# Altium PCB SensorBoard.PcbDoc
Units mm, origin at the board's own origin, x right, y up, seen from the top; angles counter-clockwise.
Board outline 80.54 x 80.54 mm, 2 copper layers (Top Layer, Bottom Layer), stack 1.595 mm thick; 19 components, 23 nets, 135 pads, 145 vias.
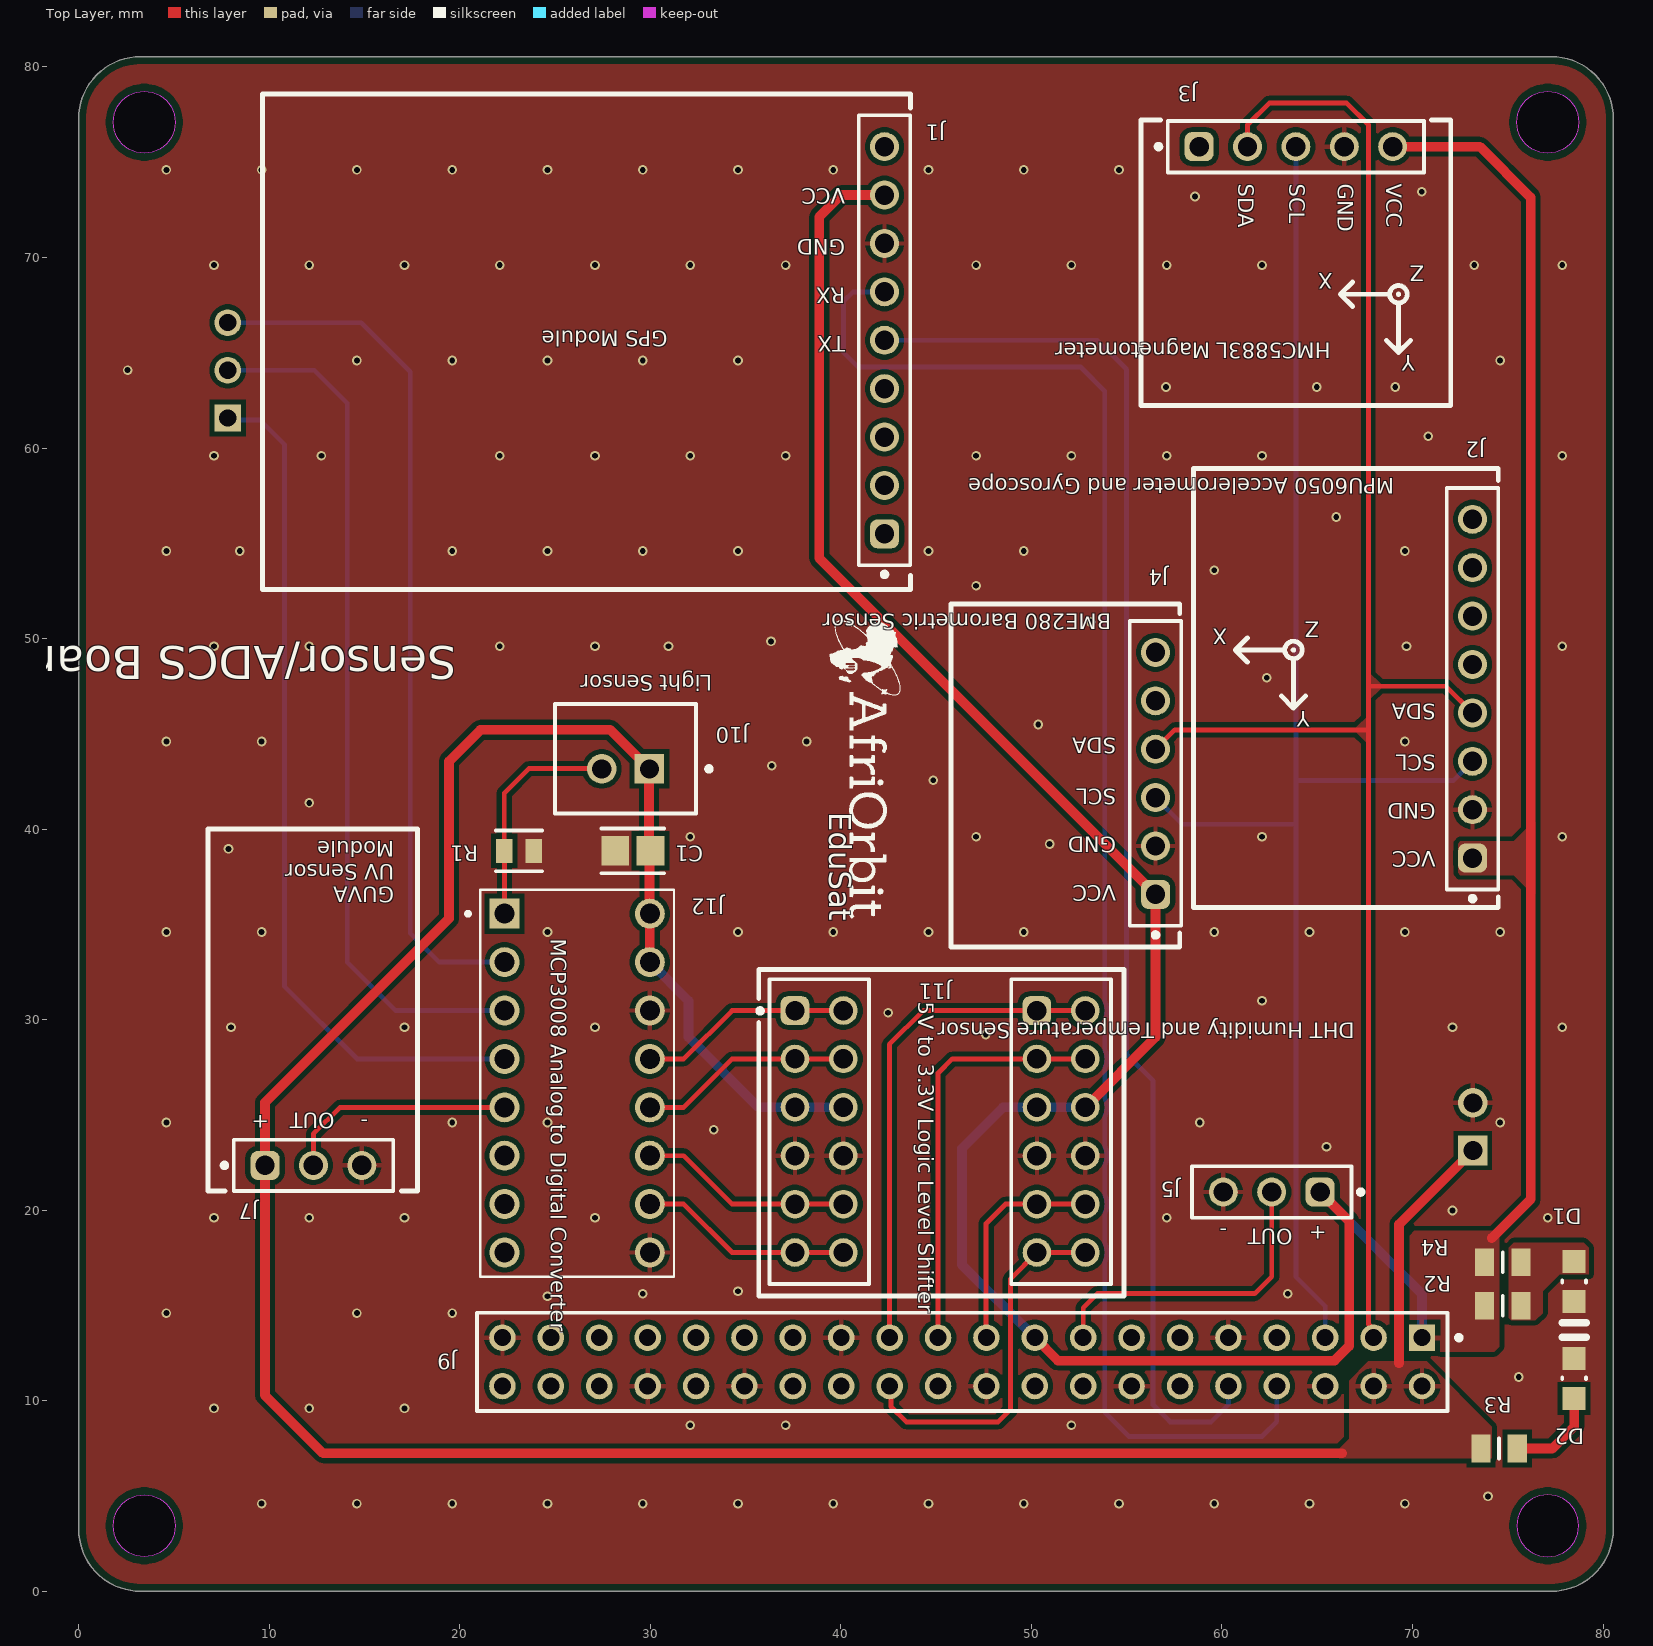
[diagram p0: Top Layer view]
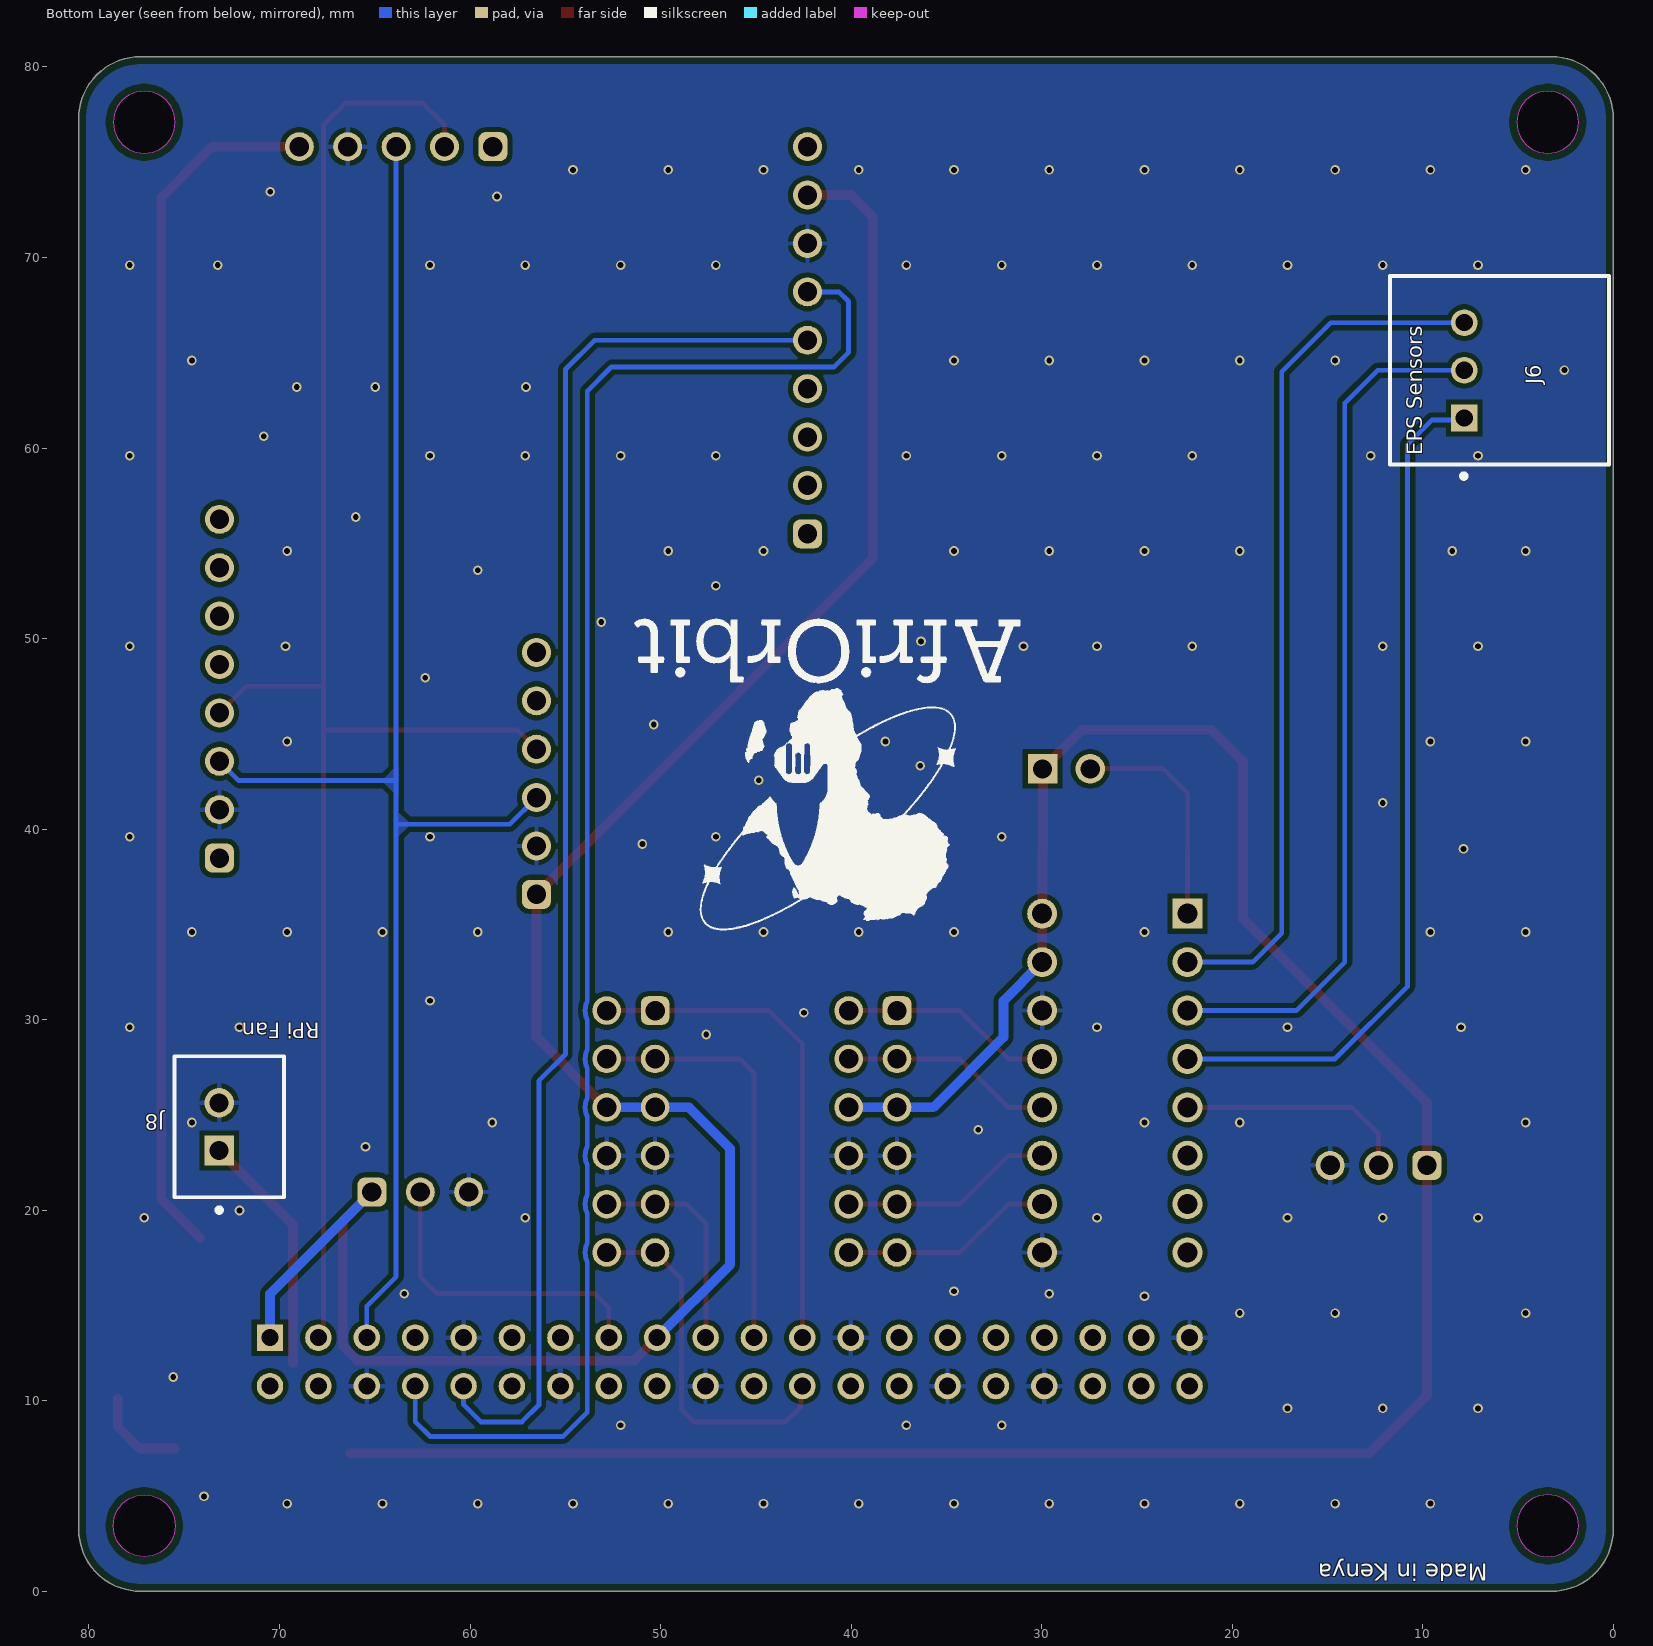
[diagram p1: Bottom Layer view, seen from below]

## Layer stack, top to bottom
Top Solder: solder mask 0.0102, Solder Resist, Dk 3.5
Top Layer: signal copper 0.0356
Dielectric 1: dielectric 1.524, FR-4, Dk 4.8
Bottom Layer: signal copper 0.0356
Bottom Solder: solder mask 0.0102, Solder Resist, Dk 3.5

## Board outline
3.25,0 cw(c3.25,3.25) 0,3.25 0,77.29 cw(c3.25,77.29) 3.25,80.54 77.29,80.54 cw(c77.29,77.29) 80.54,77.29 80.54,3.25 cw(c77.29,3.25) 77.29,0
cut-out: 77.1,75.475 cw(c77.1,77.1) 75.475,77.1 cw(c77.1,77.1) 77.1,78.725 cw(c77.1,77.1) 78.725,77.1 cw(c77.1,77.1)
cut-out: 75.475,3.44 ccw(c77.1,3.44) 77.1,1.815 ccw(c77.1,3.44) 78.725,3.44 ccw(c77.1,3.44) 77.1,5.065 ccw(c77.1,3.44)
cut-out: 3.44,1.815 cw(c3.44,3.44) 1.815,3.44 cw(c3.44,3.44) 3.44,5.065 cw(c3.44,3.44) 5.065,3.44 cw(c3.44,3.44)
cut-out: 3.44,75.475 cw(c3.44,77.1) 1.815,77.1 cw(c3.44,77.1) 3.44,78.725 cw(c3.44,77.1) 5.065,77.1 cw(c3.44,77.1)

## Design rules (kind name [scope] priority, off if disabled: settings)
BoardOutlineClearance BoardOutlineClearance_1 [All] p1: gap=0.381 ignorepadtopadclearanceinfootprint=FALSE
Clearance Clearance_1 [OnMid vs OnMid] p1: gap=0.254 ignorepadtopadclearanceinfootprint=FALSE sourcerule=41 cellrowname=All cellrowtype=0 cellcolname=All cellcoltype=0 innerlayers=TRUE
Clearance Clearance_2 [(ExistsOnLayer('Top Layer') Or ExistsOnLayer('Bottom Layer')) vs (ExistsOnLayer('Top Layer') Or ExistsOnLayer('Bottom Layer'))] p2: gap=0.254 ignorepadtopadclearanceinfootprint=FALSE sourcerule=41 cellrowname=All cellrowtype=0 cellcolname=All cellcoltype=0 outerlayers=TRUE
Clearance [All] p3: gap=0.254 ignorepadtopadclearanceinfootprint=FALSE ismatrix=TRUE
PolygonConnect [All] p1: connectstyle=Relief reliefconductorwidth=0.254 reliefentries=4 polygonreliefangle="90 Angle" airgapwidth=0.254
RoutingVias RoutingViaStyle_1 [All] p1: holewidth=0.305 width=0.508 viastyle="Through Hole" minholewidth=0.3 minwidth=0.5 maxholewidth=0.781 maxwidth=1.27
RoutingVias [All] p2: holewidth=0.711 width=1.27 viastyle="Through Hole" minholewidth=0.711 minwidth=1.27 maxholewidth=0.711 maxwidth=1.27
SolderMaskExpansion [All] p1: expansion=0.102 istentingtop=FALSE
SupplyNets "Schematic Supply Nets_2" [InNet('+5V')] p1: voltage=0.000
SupplyNets "Schematic Supply Nets_1" [InNet('GND')] p2: voltage=0.000
SupplyNets "Schematic Supply Nets" [InNet('+3.3V')] p3: voltage=0.000
Width MaxMinWidth_1 [All] p1: maxlimit=0.508 minlimit=0.254 preferedwidth=0.254 minimp=50.000000 maximp=50.000000 favimp=50.000000
30 further rules are at their usual default settings.

## Components (designator, comment, footprint, x,y, rotation, side; value= is the part's Value field where it differs from the comment)
C1 "0.1uF" FP-CL21-IPC_A 29.083,38.862 r180 top
D1 "+3.3V Indicator" LTST-C170KRKT_V 78.486,16.256 r270 top
D2 "+5V Indicator" LTST-C170KRKT_V 78.486,11.176 r90 top
J1 "61300911821" 61300911821 42.291,65.659 r90 top
J2 "61300811821" 61300811821 73.152,47.371 r90 top
J3 "61300511821" 61300511821 63.881,75.819 r0 top
J4 "61300611821" 61300611821 56.515,42.926 r90 top
J5 "61300311821" 61300311821 62.611,20.955 r180 top
J6 "EPS Sensors" FP-S3B-XH-A-1_LF_SN-MFG 5.969,64.081 r270 bottom locked
J7 "61300311821" 61300311821 12.319,22.352 r0 top
J8 "Fan Connector" FP-B2B-XH-A_LF_SN-MFG 72.644,24.384 r90 bottom locked
J9 "40-Pin Female Header" FP-7-534206-0-MFG 46.37,12.04 r180 top locked
J10 "B2B-XH-A(LF)(SN)" FP-B2B-XH-A_LF_SN-MFG 28.702,43.688 r180 top
J11 "Level Shifter Connector" 61301221821 37.592,30.48 r270 top
J12 "ADC Connector" AMPHENOL_DILB16P-223TLF 26.162,26.67 r0 top
R1 "10k" FP-MCR10-IPC_C 23.114,38.862 r0 top
R2 "105Ω" RESC2012X65N 74.737,14.986 r0 top
R3 "154Ω" RESC2012X65N 74.549,7.493 r0 top
R4 "105Ω" RESC2012X65N 74.737,17.272 r0 top

## Footprints (in the part's own frame and the unit in brackets; to place one, negate y for a bottom-side part, rotate by r counter-clockwise, add the part's x,y. Pads: shape width x height; smd on the part's side, far side on the other; paste and mask are expansions set on the pad)
61300311821 [mm] "Socket Header, Pitch 2.54 mm, THT, Vertical, single row, 3p"
  rrect50% 1.52x1.52 hole 1.02: 1(-2.54,0)
  round 1.52 hole 1.02: 2(0,0) 3(2.54,0)
  silkscreen extent -4.8,-1.35 4.19,1.35, body extent -4.06,-1.25 4.06,1.25, height 8.55
61300511821 [mm] "Socket Header, Pitch 2.54 mm, THT, Vertical, single row, 5p"
  rrect50% 1.52x1.52 hole 1.02: 1(-5.08,0)
  round 1.52 hole 1.02: 2(-2.54,0) 3(0,0) 4(2.54,0) 5(5.08,0)
  silkscreen extent -7.33,-1.35 6.73,1.35, body extent -6.6,-1.25 6.6,1.25, height 8.55
61300611821 [mm] "Socket Header, Pitch 2.54 mm, THT, Vertical, single row, 6p"
  rrect50% 1.52x1.52 hole 1.02: 1(-6.35,0)
  round 1.52 hole 1.02: 2(-3.81,0) 3(-1.27,0) 4(1.27,0) 5(3.81,0) 6(6.35,0)
  silkscreen extent -8.6,-1.35 8,1.35, body extent -7.87,-1.25 7.87,1.25, height 8.55
61300811821 [mm] "Socket Header, Pitch 2.54 mm, THT, Vertical, single row, 8p"
  rrect50% 1.52x1.52 hole 1.02: 1(-8.89,0)
  round 1.52 hole 1.02: 2(-6.35,0) 3(-3.81,0) 4(-1.27,0) 5(1.27,0) 6(3.81,0) 7(6.35,0) 8(8.89,0)
  silkscreen extent -11.14,-1.35 10.54,1.35, body extent -10.41,-1.25 10.41,1.25, height 8.55
61300911821 [mm] "Socket Header, Pitch 2.54 mm, THT, Vertical, single row, 9p"
  rrect50% 1.52x1.52 hole 1.02: 1(-10.16,0)
  round 1.52 hole 1.02: 2(-7.62,0) 3(-5.08,0) 4(-2.54,0) 5(0,0) 6(2.54,0) 7(5.08,0) 8(7.62,0) 9(10.16,0)
  silkscreen extent -12.41,-1.35 11.81,1.35, body extent -11.68,-1.25 11.68,1.25, height 8.55
61301221821 [mm] "Socket Header, Pitch 2.54 mm, THT, Vertical, dual row, 12p"
  rrect50% 1.5x1.5 hole 1.02: 1(0,0) 13(0,12.7)
  round 1.5 hole 1.02: 2(0,2.54) 3(2.54,0) 4(2.54,2.54) 5(5.08,0) 6(5.08,2.54) 7(7.62,0) 8(7.62,2.54) 9(10.16,0) 10(10.16,2.54) 11(12.7,0) 12(12.7,2.54) 14(0,15.24) 15(2.54,12.7) 16(2.54,15.24) 17(5.08,12.7) 18(5.08,15.24) 19(7.62,12.7) 20(7.62,15.24) 21(10.16,12.7) 22(10.16,15.24) 23(12.7,12.7) 24(12.7,15.24)
  silkscreen extent -1.65,-1.95 14.35,16.59, body extent -1.52,-1.27 14.22,16.51, height 8.45
AMPHENOL_DILB16P-223TLF [mm]
  rect 1.575x1.575 hole 1.05: 1(-3.81,8.89)
  round 1.575 hole 1.05: 2(-3.81,6.35) 3(-3.81,3.81) 4(-3.81,1.27) 5(-3.81,-1.27) 6(-3.81,-3.81) 7(-3.81,-6.35) 8(-3.81,-8.89) 9(3.81,-8.89) 10(3.81,-6.35) 11(3.81,-3.81) 12(3.81,-1.27) 13(3.81,1.27) 14(3.81,3.81) 15(3.81,6.35) 16(3.81,8.89)
  silkscreen extent -5.83,-10.16 5.08,10.16, body extent -5.08,-10.16 5.08,10.16, height 5.25
FP-7-534206-0-MFG [mm]
  rect 1.39x1.39 hole 0.89 paste-2539.97 mask+0: 1(-24.13,-1.27)
  round 1.39 hole 0.89 paste-2539.97 mask+0: 2(-24.13,1.27) 3(-21.59,-1.27) 4(-21.59,1.27) 5(-19.05,-1.27) 6(-19.05,1.27) 7(-16.51,-1.27) 8(-16.51,1.27) 9(-13.97,-1.27) 10(-13.97,1.27) 11(-11.43,-1.27) 12(-11.43,1.27) 13(-8.89,-1.27) 14(-8.89,1.27) 15(-6.35,-1.27) 16(-6.35,1.27) 17(-3.81,-1.27) 18(-3.81,1.27) 19(-1.27,-1.27) 20(-1.27,1.27) 21(1.27,-1.27) 22(1.27,1.27) 23(3.81,-1.27) 24(3.81,1.27) 25(6.35,-1.27) 26(6.35,1.27) 27(8.89,-1.27) 28(8.89,1.27) 29(11.43,-1.27) 30(11.43,1.27) 31(13.97,-1.27) 32(13.97,1.27) 33(16.51,-1.27) 34(16.51,1.27) 35(19.05,-1.27) 36(19.05,1.27) 37(21.59,-1.27) 38(21.59,1.27) 39(24.13,-1.27) 40(24.13,1.27)
  silkscreen extent -26.19,-2.58 25.47,2.58, body extent -25.4,-2.52 25.4,2.51, height 8.64
FP-B2B-XH-A_LF_SN-MFG [mm]
  rect 1.55x1.55 hole 1 paste-2539.97 mask+0: 1(-1.25,0.525)
  round 1.55 hole 1 paste-2539.97 mask+0: 2(1.25,0.525)
  silkscreen extent -4.5,-2.88 3.7,2.88, body extent -3.7,-2.88 3.7,2.88, height 7
FP-CL21-IPC_A [mm]
  rect 1.455x1.556 smd paste+0 mask+0: 1(-0.926,0) 2(0.926,0)
  silkscreen extent -1.65,-1.18 1.65,1.18, body extent -2.15,-1.28 2.15,1.28, height 0.25
FP-MCR10-IPC_C [mm]
  rect 0.858x1.262 smd paste+0 mask+0: 1(-0.777,0) 2(0.777,0)
  silkscreen extent -1.21,-1.07 1.21,1.07, body extent -1.31,-0.77 1.31,0.77, height 0.25
FP-S3B-XH-A-1_LF_SN-MFG [mm]
  rect 1.4x1.4 hole 0.9 paste-2539.97 mask+0: 1(2.5,-1.85)
  round 1.4 hole 0.9 paste-2539.97 mask+0: 2(0,-1.85) 3(-2.5,-1.85)
  silkscreen extent -4.95,-5.75 5.67,5.75, body extent -4.95,-5.75 4.95,5.75, height 6.1
LTST-C170KRKT_V [mm] "SMD, 2-Leads, Body 2x1.25mm"
  rect 1.2x1.2 smd: 1(-1.05,0) 2(1.05,0)
  silkscreen extent -0.05,-0.63 2.16,0.64, body extent -1,-0.63 1,0.63, height 1.2
RESC2012X65N [mm]
  rect 1x1.45 smd: 1(-0.95,0) 2(0.95,0)
  silkscreen extent 0,-0.53 0,0.53, body extent -1,-0.63 1,0.63, height 0.65

## Part data
C1: library part CMP-13271-002975-1, "50V 0.1uF X7R ±10% 0805 Multilayer Ceramic Capacitors MLCC - SMD/SMT ROHS TCC0805X7R104K500DT", Case Code (Imperial)=0805, Case Code (Metric)=2012, Dielectric=X7R, Max Operating Temperature=85°C, Min Operating Temperature=-55°C, Package Quantity=1, Tolerance=10%, Voltage Rating=50V, Capacitance=0.1uF, Case/Package=0805, Depth=1.25mm, Height=1.25mm, Length=2mm, Mount="Surface Mount", Packaging="Tape and Reel", Radiation Hardening=No, Thickness=0.057inch, Width=0.049inch
D1 D2: library part CMP-2000-07593-1, "LED Red,KT-0805R", Case Code (Imperial)=0805, Case Code (Metric)=2012, Colour=Red, Forward Current=30mA, Forward Voltage=2V, Lens Colour=Colorless, Manufacturer=Lite-On, Max Operating Temperature=85degC, Min Operating Temperature=-55degC, Package Description="2-Pin Surface Mount Device, Body 2 x 1.25 mm", Package Quantity=1, Package Reference=C170KRKT, Power Dissipation=75mW, Test Current=20mA, Case\/Package=0805, Datasheet URL=http://optoelectronics.liteon.com/upload/download/DS-22-99-0150/LTST-C170KRKT.pdf, Datasheet Version="Rev. D, 11/2014", Depth=1.6mm, Dominant Wavelength=631nm, Height=1.1mm, Illumination Colour=Red, Lead Free=LeadFree, Length=3.2mm, Lens Style=Rectangular, Lens Transparency=Clear, Luminous Intensity=54mcd, Manufacturer URL=http://www.us.liteon.com/, Mount=SurfaceMount, Mounting Technology=SurfaceMount, Number of Elements=1, Number of LEDs=1, Number of Pins=2, Packaging=TapeandReel, Power Rating=75mW, Radiation Hardening=No, RoHSCompliant=True, Viewing Angle=130degrees, Wavelength=639nm, Width=1.25mm
J1: library part CMP-1502-01331-3, Contact Resistance=20mΩ, Current Rating=3A, Operating Supply Voltage=250V, Gender=Female, Lead Pitch=2.54mm, NexarPartId=61924727, Number of Pins=9, Orientation=Vertical, RoHS=Non-Compliant
J2: library part CMP-1502-01327-3, Contact Resistance=20mΩ, Current Rating=3A, Operating Supply Voltage=250V, Gender=Female, Lead Pitch=2.54mm, NexarPartId=61924723, Number of Pins=8, Orientation=Vertical, RoHS=Non-Compliant
J3: library part CMP-1502-01320-3, Contact Resistance=20mΩ, Current Rating=3A, Operating Supply Voltage=250V, Gender=Female, Lead Pitch=2.54mm, NexarPartId=61924716, Number of Pins=5, Orientation=Vertical, RoHS=Non-Compliant
J4: library part CMP-1502-01322-3, Contact Resistance=20mΩ, Current Rating=3A, Operating Supply Voltage=250V, Gender=Female, Lead Pitch=2.54mm, NexarPartId=21642411, Number of Pins=6, Orientation=Vertical, RoHS=Compliant
J5 J7: library part CMP-1502-01315-3, Contact Resistance=20mΩ, Current Rating=3A, Operating Supply Voltage=250V, Gender=Female, Lead Pitch=2.54mm, NexarPartId=61924710, Number of Pins=3, Orientation=Vertical, RoHS=Non-Compliant
J6: library part CMP-17439-000427-1, "CONN HEADER R/A 3POS 2.5MM  / HCZZ0139-3", Color=Natural, Flammability Rating="UL94 V-0", Max Operating Temperature=85°C, Min Operating Temperature=-25°C, Package Quantity=1000, Voltage Rating=250V, Connector Type=Header, Contact Finish - Mating=TIN, Contact Material=Brass, Contact Plating=Tin, Contact Shape=Square, Contact Type="Male Pin", Fastening Type=Detent, Insulation Color=Natural, Insulation Material=Nylon, Lead Free="Lead Free", Mount="Through Hole", Number of Positions=3, Number of Rows=1, Packaging=Bulk, Pitch=0.098inch, Series=XH, Termination=Press-Fit
J8 J10: library part CMP-2000-05888-3, "CONN HEADER VERT 2POS 2.5MM", Color=Natural, Contact Resistance=20mR, Current Rating=3A, Housing Color=White, Insulation Resistance=1GR, Max Operating Temperature=85°C, Max Voltage Rating (AC)=250V, Min Operating Temperature=-25°C, Connector Type="Male Pin", Contact Material=Brass, Contact Plating=Tin, Contact Type="Male Pin", Depth=5.75mm, Fastening Type=Detent, Housing Material=Polyamide, Lead Free="Lead Free", Lead Pitch=2.5mm, Length=7.4mm, Max Current Rating=3A, Max Voltage Rating (DC)=250V, Mount="Through Hole", Number of Contacts=2, Number of Positions=2, Number of Rows=1, Orientation=Straight, Packaging=Bulk, Pitch=2.5mm, REACH SVHC="No SVHC", Series=XH, Termination=Solder, Voltage Rating=250V, Voltage Rating (AC)=250V, Wire/Cable Gauge=22AWG
J9: library part CMP-002-00081-2, "Board Connector, 40 Contact(s), 2 Row(s), Female, Straight, 0.1 inch Pitch, Solder Terminal, Locking, Black Insulator, Receptacle", Max Operating Temperature=105°C, Min Operating Temperature=-65°C, Connector Type="BOARD CONNECTOR", Mounting Technology=Board, RoHS Compliant=Yes
J11: library part CMP-002-00083-1, "3.3V to 5V Level Shifter Connector", Max Operating Temperature=125°C, Min Operating Temperature=-40°C, Connector Type="BOARD CONNECTOR", Mounting Technology=Board, RoHS Compliant=Yes
J12: library part CMP-002-00080-2, "DIP Socket, Stamped and Formed", Case/Package=None, Availability="In Stock", Check_prices=https://www.snapeda.com/parts/DILB16P-223TLF/Amphenol+FCI/view-part/?ref=eda, Component Type=Standard, Design Item ID=DILB16P-223TLF, MF="Amphenol ICC (FCI)", MP=DILB16P-223TLF, Pins=16, Price=None, SnapEDA_Link=https://www.snapeda.com/parts/DILB16P-223TLF/Amphenol+FCI/view-part/?ref=snap, Source=DILB16P-223TLF.SchLib
R1: library part CMP-08839-012433-1, "Thick Film Chip Resistor, 0805, 10kΩ, 1%, 100ppm/°C, 0.125W, 150V  / 0805W8F1002T5E", Case/Package=0805, Max Operating Temperature=155°C, Min Operating Temperature=-55°C, Power Rating=125mW, Resistance=10kR, Resistor Type="Thick Film", Temperature Coefficient=100ppm/°C, Tolerance=1%, Voltage Rating (DC)=150V, Contact Plating=Tin, Height=550um, Lead Free="Lead Free", Length=2mm, Mount="Surface Mount", Number of Terminations=2, Radiation Hardening=No, Width=1.25mm, Working Voltage=150V
R2 R4: library part AECR0805F27R0K9, "125mW Thick Film Resistors 150V ±100ppm/℃ ±1% 105Ω 0805 Chip Resistor - Surface Mount ROHS CR0805F105RP05Z", Manufacturer_Name=ResistorToday, Datasheet Link=https://datasheet.lcsc.com/lcsc/2304140030_RESI-AECR0805F27R0K9_C352233.pdf, Height=0.65mm, Manufacturer_Part_Number=AECR0805F27R0K9
R3: library part AECR0805F27R0K9, "125mW Thick Film Resistors 150V ±100ppm/℃ ±1% 154Ω 0805 Chip Resistor - Surface Mount ROHS CR0805F81540G", Manufacturer_Name=ResistorToday, Datasheet Link=https://datasheet.lcsc.com/lcsc/2304140030_RESI-AECR0805F27R0K9_C352233.pdf, Height=0.65mm, Manufacturer_Part_Number=AECR0805F27R0K9

## Via types
v1: diameter 0.508, hole 0.305, Top Layer to Bottom Layer, 145 vias

## Nets (pads, with @x,y where several pads share a name; then routed paths per layer and width w, separated by ;. In a path a pad name is that pad's centre, name@x,y a point inside that pad or via, vN(x,y) a via of type N, cw(c..) or ccw(c..) an arc to the next point about the centre after c; other vN are vias at no path point)
+3.3V: J1.8 J2.1 J3.5 J4.1 J5.1 J9.1 J9.17 J11.17 J11.18 R2.1 R4.1 | length 178
  Top Layer w0.508: J1.8 40.005,73.279 38.862,72.136 38.862,54.229 J4.1 56.515,29.083 J11.18 ; J9.17 51.383,12.107 65.918,12.107 66.675,12.864 66.675,19.431 J5.1 ; J3.5 73.533,75.819 76.2,73.152 76.2,20.574 74.168,18.542
  Bottom Layer w0.508: J9.17 46.355,17.135 46.355,23.241 48.514,25.4 J11.17 J11.18 ; J5.1 70.5,15.606 J9.1
+5V: C1.1 J7.1 J8.1 J9.2 J9.4 J10.1 J11.5 J11.6 J12.15 J12.16 R3.1 | length 144.5
  Top Layer w0.508: J12.15 J12.16 29.954,35.578 29.954,38.844 29.935,38.862 29.935,43.146 J10.1 27.903,45.212 21.082,45.212 19.431,43.561 19.431,35.306 9.779,25.654 J7.1 9.779,10.287 12.827,7.239 66.318,7.239 ; 69.297,11.973 69.297,19.262 J8.1
  Bottom Layer w0.508: J12.15@29.998,32.994 32.004,30.988 32.004,29.083 35.687,25.4 J11.6
CH0: J10.2 J12.1 R1.1 | length 12
  Top Layer w0.254: J12.1 22.352,38.847 R1.1 22.337,41.895 23.622,43.18 27.435,43.18 J10.2
CH1: J6.3 J12.2 | length 45.7
  Bottom Layer w0.254: J6.3 14.826,66.581 17.399,64.008 17.399,34.544 18.923,33.02 J12.2
CH2: J6.2 J12.3 | length 45.6
  Bottom Layer w0.254: J6.2 12.373,64.081 14.097,62.357 14.097,33.02 16.637,30.48 J12.3
CH3: J6.1 J12.4 | length 45.1
  Bottom Layer w0.254: J6.1 7.932,61.468 9.525,61.468 10.795,60.198 10.795,31.75 14.605,27.94 J12.4
CH4: J7.2 J12.5 | length 12.3
  Top Layer w0.254: J7.2 12.319,24.003 13.716,25.4 J12.5
CLK: J11.1 J11.2 J12.13 | length 11.2
  Top Layer w0.254: J12.13 31.75,27.94 34.29,30.48 J11.1 J11.2
CS: J11.11 J11.12 J12.10 | length 11.2
  Top Layer w0.254: J12.10 31.75,20.32 34.29,17.78 J11.12
D-CLK: J9.23 J11.13 J11.14 | length 26.4
  Top Layer w0.254: J9.23 42.545,13.325 42.545,28.702 44.323,30.48 J11.13 J11.14
D-CS: J9.24 J11.23 J11.24 | length 19.3
  Top Layer w0.254: J9.24 42.63,10.7 42.63,9.694 43.434,8.89 48.26,8.89 48.895,9.525 48.895,16.383 J11.23 J11.24
D-MISO: J9.21 J11.15 J11.16 | length 21.9
  Top Layer w0.254: J9.21 45.1,27.193 45.847,27.94 J11.15 J11.16
D-MOSI: J9.19 J11.21 J11.22 | length 11.6
  Top Layer w0.254: J9.19 47.625,13.325 47.625,19.304 48.641,20.32 J11.21 J11.22
DHTOUT: J5.2 J9.15 | length 16.6
  Top Layer w0.254: J9.15 52.72,14.874 53.467,15.621 61.722,15.621 62.611,16.51 J5.2
GND: C1.2 D1.2 D2.2 J1.7 J2.2 J3.4 J4.2 J5.3 J7.3 J8.2 J9.6 J9.9 J9.14 J9.20 J9.25 J9.30 J9.34 J9.39 J11.7 J11.8 J11.19 J11.20 J12.9 J12.14 R1.2
  other v1: 9.6,4.6 14.6,4.6 19.6,4.6 24.6,4.6 29.6,4.6 34.6,4.6 39.6,4.6 44.6,4.6 49.6,4.6 54.6,4.6 59.6,4.6 64.6,4.6 69.6,4.6 73.965,4.981 32.1,8.711 37.1,8.711 52.1,8.711 7.1,9.6 12.1,9.6 17.1,9.6 75.576,11.251 4.6,14.6 14.6,14.6 19.6,14.6 24.6,15.489 29.6,15.616 63.457,15.616 34.6,15.743 7.1,19.6 12.1,19.6 17.1,19.6 27.1,19.6 57.1,19.6 77.1,19.6 72.1,19.981 65.489,23.33 33.33,24.219 4.6,24.6 19.6,24.6 24.6,24.6 58.838,24.6 74.6,24.6 47.608,29.219 7.989,29.6 17.1,29.6 27.1,29.6 72.1,29.6 77.862,29.6 42.481,30.362 62.1,30.997 4.6,34.6 9.6,34.6 24.6,34.6 34.6,34.6 39.6,34.6 44.6,34.6 49.6,34.6 59.6,34.6 64.6,34.6 69.6,34.6 74.6,34.6 7.862,38.965 50.957,39.219 32.1,39.6 47.1,39.6 62.1,39.6 77.862,39.6 12.1,41.378 44.854,42.568 36.378,43.33 4.6,44.6 9.6,44.6 38.203,44.6 69.6,44.6 50.362,45.489 62.354,47.949 7.1,49.6 12.1,49.6 22.1,49.6 27.1,49.6 30.957,49.6 69.687,49.6 77.862,49.6 36.338,49.854 53.116,50.87 47.1,52.775 59.6,53.584 4.6,54.6 8.457,54.6 19.6,54.6 24.6,54.6 29.6,54.6 34.6,54.6 44.6,54.6 49.6,54.6 69.6,54.6 65.997,56.378 7.1,59.6 12.735,59.6 22.1,59.6 27.1,59.6 32.1,59.6 37.1,59.6 47.1,59.6 52.1,59.6 57.1,59.6 62.1,59.6 77.862,59.6 70.83,60.616 57.06,63.203 64.981,63.203 69.092,63.203 2.568,64.092 14.6,64.6 19.6,64.6 24.6,64.6 29.6,64.6 34.6,64.6 74.6,64.6 7.1,69.6 12.1,69.6 17.1,69.6 22.1,69.6 27.1,69.6 32.1,69.6 37.1,69.6 47.1,69.6 52.1,69.6 57.1,69.6 62.1,69.6 73.243,69.6 77.862,69.6 58.584,73.203 70.489,73.457 4.6,74.6 9.6,74.6 14.6,74.6 19.6,74.6 24.6,74.6 29.6,74.6 34.6,74.6 39.6,74.6 44.6,74.6 49.6,74.6 54.6,74.6
MISO: J11.3 J11.4 J12.12 | length 11.2
  Top Layer w0.254: J12.12 31.75,25.4 34.29,27.94 J11.3 J11.4
MOSI: J11.9 J11.10 J12.11 | length 11.2
  Top Layer w0.254: J12.11 31.75,22.86 34.29,20.32 J11.9 J11.10
NetD1_1: D1.1 R2.2 R4.2
NetD2_1: D2.1 R3.2 | length 5
  Top Layer w0.508: R3.2 77.343,7.493 78.486,8.636 D2.1
RX: J1.6 J9.8 | length 85.1
  Bottom Layer w0.254: J1.6 40.64,68.199 40.132,67.691 40.132,65.024 40.894,64.262 52.578,64.262 53.848,62.992 53.848,30.977 cw(c52.832,30.48) 53.848,29.983 53.848,28.437 cw(c52.832,27.94) 53.848,27.443 53.848,25.897 cw(c52.832,25.4) 53.848,24.903 53.848,23.357 cw(c52.832,22.86) 53.848,22.363 53.848,20.817 cw(c52.832,20.32) 53.848,19.823 53.848,18.277 cw(c52.832,17.78) 53.848,17.283 53.848,17.197 53.848,9.398 55.118,8.128 62.103,8.128 62.88,8.905 J9.8
SCL: J2.3 J3.3 J4.3 J9.5 | length 80.8
  Bottom Layer w0.254: J4.3 57.912,40.259 63.881,40.259 ; J3.3 63.881,42.545 ; J9.5 65.42,14.971 63.881,16.51 63.881,40.259 ; J2.3 72.136,42.545 63.881,42.545 ; 63.881,40.259 63.881,42.545
SDA: J2.4 J3.2 J4.4 J9.3 | length 89.8
  Top Layer w0.254: J4.4 57.531,45.212 67.691,45.212 ; J3.2 61.341,76.962 62.484,78.105 66.548,78.105 67.691,76.962 67.691,47.498 ; J9.3 67.743,13.527 67.743,13.975 67.691,14.027 67.691,45.212 ; J2.4 71.755,47.498 67.691,47.498 ; 67.691,45.212 67.691,47.498
TX: J1.5 J9.10 | length 73.9
  Bottom Layer w0.254: J1.5 53.467,65.659 54.991,64.135 54.991,28.194 56.388,26.797 56.388,9.779 57.277,8.89 59.436,8.89 60.34,9.794 J9.10
pads on no net: J1.1 J1.2 J1.3 J1.4 J1.9 J2.5 J2.6 J2.7 J2.8 J3.1 J4.5 J4.6 J9.7 J9.11 J9.12 J9.13 J9.16 J9.18 J9.22 J9.26 J9.27 J9.28 J9.29 J9.31 J9.32 J9.33 J9.35 J9.36 J9.37 J9.38 J9.40 J12.6 J12.7 J12.8

## Polygon pours and split planes (outlines as drawn)
GND on Top Layer "GND_L01_P009" (solid, pour order 9): 0,0 80.518,0 80.518,80.391 80.772,80.645 80.645,80.772 -0.127,80.772
+3.3V on Top Layer "+3.3V_L01_P008" (solid, pour order 8): 72.39,39.243 72.39,37.719 72.517,37.592 75.311,37.592 76.454,36.449 76.454,40.513 75.311,39.37 72.517,39.37
SDA on Top Layer "SDA_L01_P004" (solid, pour order 4): 68.326,47.625 67.564,48.387 67.564,46.609 68.326,47.371
SDA on Top Layer "SDA_L01_P003" (solid, pour order 3): 67.056,45.339 67.818,46.101 67.818,44.323 67.056,45.085
NetD1_1 on Top Layer "NETD1_1_L01_P002" (solid, pour order 2): 75.057,14.351 75.184,14.224 76.454,14.224 76.835,14.605 76.835,15.748 77.724,16.637 79.248,16.637 79.248,18.034 78.994,18.288 75.311,18.288 75.057,18.034
+3.3V on Top Layer "+3.3V_L01_P001" (solid, pour order 1): 69.85,12.7 69.977,12.573 74.295,12.573 74.549,12.827 74.549,18.669 74.295,18.923 70.104,18.923 69.85,18.669
+5V on Top Layer "+5V_L01_P000" (solid, pour order 0): 67.691,12.065 66.675,11.049 66.675,8.001 66.167,7.493 66.167,6.985 74.168,6.985 74.168,8.636 70.739,12.065
GND on Bottom Layer "GND_L02_P011" (solid, pour order 11): 0,0 80.518,0 80.518,80.391 80.772,80.645 80.645,80.772 -0.127,80.772
SCL on Bottom Layer "SCL_L02_P007" (solid, pour order 7): 63.246,40.386 64.008,41.148 64.008,39.37 63.246,40.132
SCL on Bottom Layer "SCL_L02_P006" (solid, pour order 6): 64.516,42.672 63.754,43.434 63.754,41.656 64.516,42.418

## Silkscreen, mask and mechanical layers (free items; w line width, h text height)
Top Overlay:
  drawing of 61 lines, arcs and shapes, not listed
  text "SDA" at 60.866,73.881 h0.8 r270
  text "SCL" at 63.533,73.881 h0.8 r270
  text "GND" at 66.073,73.881 h0.8 r270
  text "VCC" at 68.613,73.881 h0.8 r270
  text "VCC" at 40.226,73.627 h0.8 r180
  text "GND" at 40.226,70.96 h0.8 r180
  text "Z" at 70.629,69.563 h0.8 r180
  text "X" at 65.803,69.182 h0.8 r180
  text "RX" at 40.226,68.42 h0.8 r180
  text "GPS Module" at 30.924,66.167 h0.8 r180
  text "TX" at 40.226,65.88 h0.8 r180
  text "HMC5883L Magnetometer" at 65.722,65.532 h0.8 r180
  text "Y" at 70.121,64.864 h0.8 r180
  text "MPU6050 Accelerometer and Gyroscope" at 69.033,58.42 h0.8 r180
  text "BME280 Barometric Sensor" at 54.184,51.308 h0.8 r180
  text "Z" at 65.118,50.894 h0.8 r180
  text "X" at 60.292,50.513 h0.8 r180
  text "Sensor/ADCS Board" at 19.812,50.165 h3 r180
  text "Light Sensor" at 33.241,48.087 h0.8 r180
  text "SDA" at 71.214,46.576 h0.8 r180
  text "Y" at 64.61,46.195 h0.8 r180
  text "SDA" at 54.45,44.798 h0.8 r180
  text "SCL" at 71.214,43.909 h0.8 r180
  text "SCL" at 54.45,42.131 h0.8 r180
  text "GND" at 71.214,41.369 h0.8 r180
  text "EduSat" at 39.001,40.878 h2 r270
  text "GND" at 54.45,39.591 h0.8 r180
  text "GUVA / UV Sensor / Module" at 16.573,39.37 h0.8 r180
  text "VCC" at 71.214,38.829 h0.8 r180
  text "VCC" at 54.45,37.051 h0.8 r180
  text "MCP3008 Analog to Digital Converter" at 24.765,34.247 h0.8 r270
  text "5V to 3.3V Logic Level Shifter" at 44.069,30.945 h0.8 r270
  text "DHT Humidity and Temperature Sensor" at 66.97,29.845 h0.8 r180
  text "OUT" at 13.429,25.113 h0.8 r180
  text "+" at 10,24.992 h0.8 r180
  text "-" at 15.207,25.005 h0.8 r180
  text "-" at 60.292,19.29 h0.8 r180
  text "+" at 65.499,19.15 h0.8 r180
  text "OUT" at 63.721,19.017 h0.8 r180
Bottom Overlay:
  drawing of 13 lines, arcs and shapes, not listed
  text "EPS Sensors" at 10.033,59.626 h0.8 r270
  text "RPi Fan" at 67.882,29.845 h0.8 r180
  text "Made in Kenya" at 6.586,1.725 h1.5 r180